# Altium PCB Nguyen Quang Minh.PcbDoc
Units mil, origin at the board's own origin, x right, y up, seen from the top; angles counter-clockwise.
Board outline 3550.03 x 1973.53 mil, 2 copper layers (Top Layer, Bottom Layer); 16 components, 12 nets, 41 pads, 0 vias.
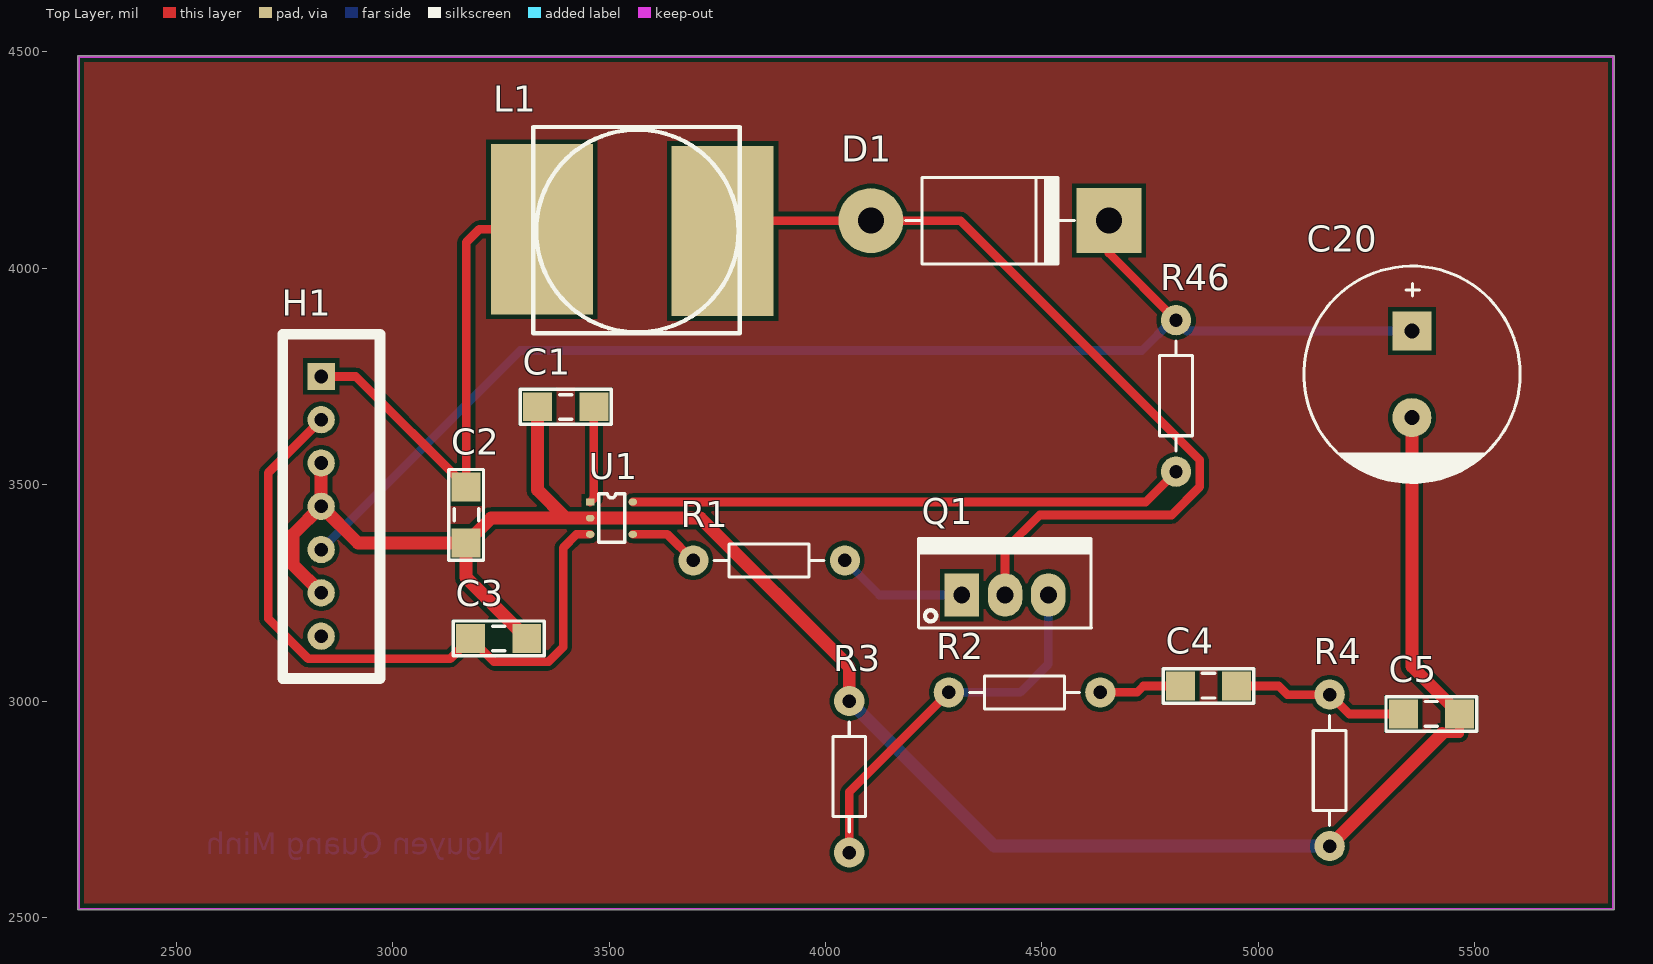
[diagram p0: Top Layer view]
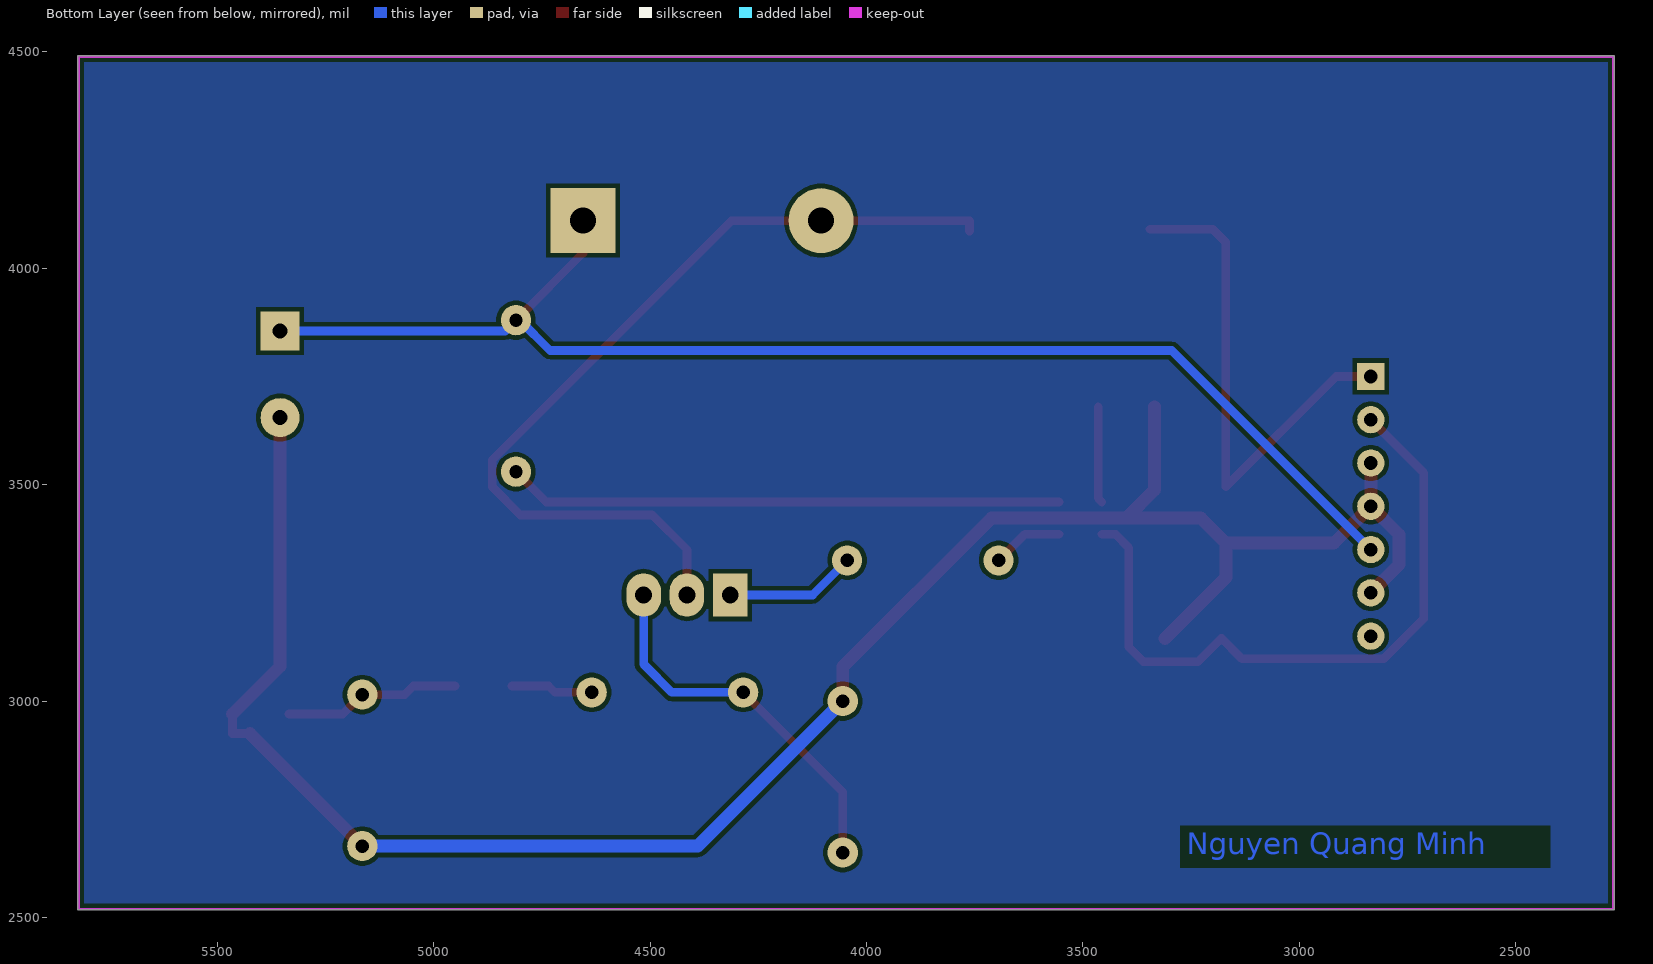
[diagram p1: Bottom Layer view, seen from below]
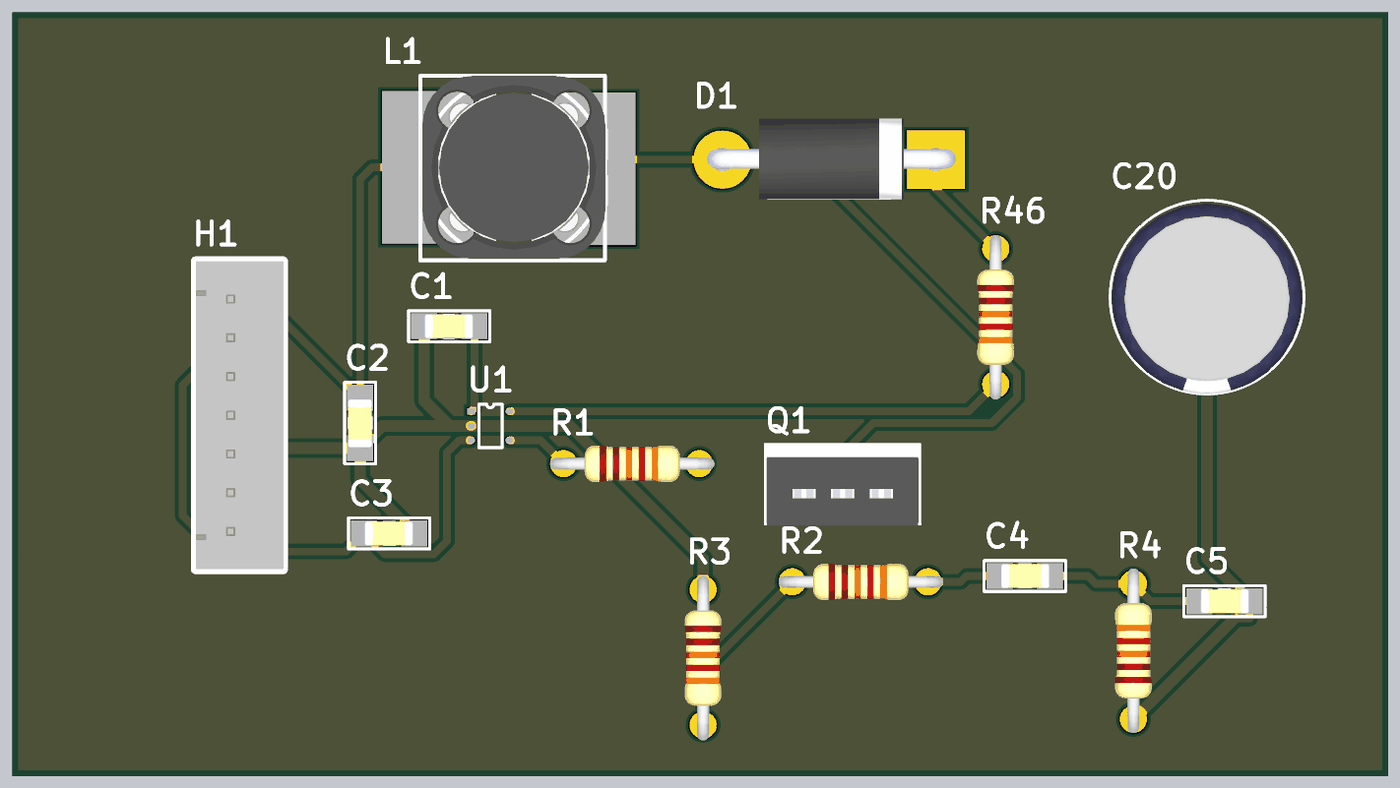
[diagram p2: 3D render of the assembled board from above, using the file's embedded part models]

## Layer stack, top to bottom
Top Solder: solder mask 0.4, Solder Resist, Dk 3.5
Top Layer: signal copper 1.4
Dielectric 1: dielectric 12.6, FR-4, Dk 4.8
Bottom Layer: signal copper 1.4
Bottom Solder: solder mask 0.4, Solder Resist, Dk 3.5

## Board outline
2275,2517.49 cw(c2275,2520) 2272.49,2520 2272.49,4488.5 cw(c2275,4488.5) 2275,4491.02 5818.31,4491.02 cw(c5818.31,4488.5) 5819.15,4490.87 cw(c5820,4488.5) 5822.52,4488.5 5822.52,2520 cw(c5820,2520) 5820,2517.49

## Design rules (kind name [scope] priority, off if disabled: settings)
Clearance [All] p1: gap=10 ignorepadtopadclearanceinfootprint=FALSE except(0: Arc-Hole Track-Hole SMDPad-Hole THPad-Hole Via-Hole Fill-Hole Poly-Hole Region-Hole Text-Hole)
PolygonConnect [All] p1: connectstyle=Relief reliefconductorwidth=10 reliefentries=4 polygonreliefangle="90 Angle" airgapwidth=10
RoomDefinition "Nguyen Quang Minh" [InComponentClass('Nguyen Quang Minh')] p1: confinementstyle=ConfineIn formatcopy=TRUE lockcomponents=FALSE outline 7045,1055 10825,1055 10825,1995 7045,1995
RoutingVias [All] p1: holewidth=28 width=50 viastyle="Through Hole" minholewidth=28 minwidth=50 maxholewidth=28 maxwidth=50
SolderMaskExpansion [All] p1: expansion=4 istentingtop=FALSE
Width [All] p1: maxlimit=30 minlimit=15 preferedwidth=20
30 further rules are at their usual default settings.

## Components (designator, comment, footprint, x,y, rotation, side; value= is the part's Value field where it differs from the comment)
C1 "106" "tu 1206" 3400,3680 r180 top
C2 "106" "tu 1206" 3170,3430.04 r270 top
C3 "106" "tu 1206" 3245,3145 r180 top
C4 "106" "tu 1206" 4885,3035 r0 top
C5 "106" "tu 1206" 5400,2970 r0 top
C20 "Cap Pol3" CP2/5 5355,3855 r270 top value=C?
D1 "1N5408" D5A 4655,4110 r180 top
H1 "Header 7P 2.54 Duc Thang" XH2.54M-7 2835,3750 r270 top
L1 "100uH - 3A SMD" "Cuon Cam 12x12x10" 3801.69,3849.84 r90 top
Q1 "IRFZ44" TO220 4315,3245 r0 top
R1 "Res1" R1/4W 4045,3325 r180 top value=1K
R2 "Res1" R1/4W 4635,3020 r180 top value=1K
R3 "Res1" R1/4W 4055,2650 r90 top value=1K
R4 "Res1" R1/4W 5165,3015 r270 top value=1K
R46 "Res1" R1/4W 4810,3530 r90 top value=1K
U1 "IRS2505" IRS2505 3456.57,3460 r0 top

## Footprints (in the part's own frame and the unit in brackets; to place one, negate y for a bottom-side part, rotate by r counter-clockwise, add the part's x,y. Pads: shape width x height; smd on the part's side, far side on the other; paste and mask are expansions set on the pad)
CP2/5 [mil] "Tu hoa 1000uF/25V,50V"
  rect 90x90 hole 35: 1(0,0)
  round 90 hole 35: 2(200,0)
  silkscreen extent -150,-250 350,250, body extent -142,-246 350,246, height 984
"Cuon Cam 12x12x10" [mm] "Cuon Cam 12x12x10"
  rect 10x6 smd: 1(6.1,11.6) 2(6,1)
  silkscreen extent 0,0 12.1,12.1, body extent 0.1,-0.2 12.1,12.14, height 7.51
D5A [mil] "Diode 5A, W 200mil, L 550mil"
  round 150 hole 60: 1(550,0)
  rect 150x150 hole 60: 2(0,0)
  silkscreen extent 80,-100 470,100, body extent -52,-106 590,103, height 254
IRS2505 [mm]
  rect 0.5x0.4 smd: 1(0,0)
  oval 0.5x0.4 smd: 2(0,-0.95) 3(0,-1.9) 4(2.5,-1.9) 5(2.5,0)
  silkscreen extent 0.51,-2.38 2.03,0.48
R1/4W [mil] "R 1/4W, 2 Pin, 350mil"
  round 70 hole 31: 1(0,0) 2(350,0)
  silkscreen extent 48,-38 302,38, body extent -40,-47 386,47, height 111
TO220 [mil] "TO-220"
  rect 80x100 hole 39: 1(0,0)
  oval 80x100 hole 39: 2(100,0) 3(200,0)
  silkscreen extent -100,-76 300,130, body extent -95,-80 295,97, height 323
"tu 1206" [mm]
  rect 1.7x1.7 smd: 1(-1.65,0) 2(1.65,0)
  silkscreen extent -2.67,-1.02 2.67,1.02, body extent -1.57,-0.8 1.63,0.8, height 0.94
XH2.54M-7 [mm]
  rect 1.6x1.6 hole 0.8: 1(0,0)
  round 1.6 hole 0.8: 2(2.54,0) 3(5.08,0) 4(7.62,0) 5(10.16,0) 6(12.7,0) 7(15.24,0)
  silkscreen extent -2.48,-2.26 17.72,3.46, body extent -2.48,-2.26 17.72,3.48, height 6.91

## Part data
C1 C2 C3 C4 C5: library part "Tu 1206 106 16V 20%", "Dán", Chung_Loai=Dán, Don_Vi=Con, Ma_Hang=MH004541, So_Chan=2, Ten_Linh_Kien="Tụ 1206 106-10uF 20% 16V"
C20: library part "Cap Pol3_2", "Polarized Capacitor (Surface Mount)", LatestRevisionDate=17-Jul-2002, LatestRevisionNote="Re-released for DXP Platform.", PackageReference=C0805, Publisher="Altium Limited"
D1: library part D5A, "Diode 5A"
H1: "Cắm", Chung_Loai=Cắm, Don_Vi=Con, Ma_Hang=MH003369, Ten_Linh_Kien="Header 7P XH2.54-7P Đực Thẳng"
L1: library part "CUON CAM 100uH SMD", "Dán", Chung_Loai=Dán, Don_Vi=Con, Ten_Linh_Kien="Cuộn Cảm 100uH 7x7x4MM CD74"
Q1: library part "IRFZ44 DIP", "N-Channel Power MOSFET"
R1 R2 R3 R4 R46: library part Res1_1, "Resistor", Manufacturer="Generic Components", Class=Passive, Published=08/06/2000, Publisher="Altium Hobart Technology Centre", SubClass=Resistor

## Nets (pads, with @x,y where several pads share a name; then routed paths per layer and width w, separated by ;. In a path a pad name is that pad's centre, name@x,y a point inside that pad or via, vN(x,y) a via of type N, cw(c..) or ccw(c..) an arc to the next point about the centre after c; other vN are vias at no path point)
"DC BUS +": C20.1 D1.2 H1.5 R46.2 | length 3044.1
  Top Layer w20: D1.2 4655,4035 R46.2
  Bottom Layer w20: H1.5 3295,3810 4731.17,3810 4801.17,3880 R46.2 4835,3855 C20.1
"DC BUS -": C1.2 C2.2 C3.1 C5.2 C20.2 H1.3 H1.4 H1.6 R3.2 R4.2 U1.2 | length 4848.5
  Top Layer w20: 5425,2925 5464.96,2925 C5.2
  Top Layer w30: H1.6 2770,3315 2770,3385 H1.4 ; H1.3 H1.4 ; C3.1 3170,3284.96 C2.2 ; C1.2 3335.04,3487.56 3400,3422.6 ; R3.2 4055,3079 3711.4,3422.6 U1.2 3400,3422.6 ; R4.2 5425,2925 ; C20.2 5355,3079.96 C5.2 ; H1.4 2919.92,3365.08 C2.2 ; C2.2 3227.52,3422.6 3400,3422.6
  Bottom Layer w30: R3.2 4390,2665 R4.2
NetC1_1: C1.1 U1.1 | length 223.5
  Top Layer w20: U1.1 3464.96,3468.39 C1.1
NetC4_1: C4.1 R2.1 | length 191.3
  Top Layer w20: R2.1 4720,3020 4735,3035 C4.1
NetC4_2: C4.2 C5.1 R4.1 | length 412
  Top Layer w20: C4.2 5047,3035 5067,3015 R4.1 5210,2970 C5.1
NetD1_1: D1.1 L1.2 Q1.2 | length 2032.7
  Top Layer w20: L1.2 3762.32,4110 D1.1 4312,4110 4865,3557 4865,3495 4800,3430 4495,3430 4415,3350 Q1.2
NetQ1_1: Q1.1 R1.1 | length 303.1
  Bottom Layer w20: R1.1 4125,3245 Q1.1
NetQ1_3: Q1.3 R2.2 R3.1 | length 882.2
  Top Layer w20: R3.1 4055,2790 R2.2
  Bottom Layer w20: R2.2 4450,3020 4515,3085 Q1.3
NetR1_2: R1.2 U1.4 | length 164.9
  Top Layer w20: U1.4 3634.8,3385.2 R1.2
NetR46_1: R46.1 U1.5 | length 1284
  Top Layer w20: U1.5 4740,3460 R46.1
"RECT +": C2.1 H1.1 L1.1 | length 1193.1
  Top Layer w20: H1.1 2915,3750 C2.1 3170,4060 3200,4090 L1.1
"VCC +": C3.2 H1.2 U1.3 | length 1590.6
  Top Layer w20: H1.2 2712.43,3527.43 2712.43,3190.57 2805,3098 3133.04,3098 C3.2 3234.04,3091 3360,3091 3394,3125 3394,3354.2 3425,3385.2 U1.3
pads on no net: H1.7

## Polygon pours and split planes (outlines as drawn)
no net on Bottom Layer "NONET_L02_P000" (solid, pour order 0): 2275,4490 5820,4490 5820,2520 2275,2520
no net on Top Layer "NONET_L01_P001" (solid, pour order 1): 2275,4490 5820,4490 5820,2520 2275,2520

## Keep-outs
Keep-Out Layer:
  lines w5: 5818.31,4488.5 2275,4488.5 2275,2520 5820,2520 5820,4488.5

## Other copper
Bottom Layer:
  text "Nguyen Quang Minh" at 3260,2646.66 h50